# EAGLE board panel - type I - front - pads only (EAGLE 6.1)

Size 82 x 283 mm. Coordinates in mm from the lower left corner, seen from the top.
Outline: 0,0 0,283 82,283 82,0 0,0
Copper layers (1*16): Top 0.035mm / dielectric 1.5mm / Bottom 0.035mm
Design rules: minimum track width 10mil, minimum drill 24mil, track to track 8mil, track to pad 8mil, pad to pad 8mil, via to via 8mil, smd to smd 8mil, copper to edge 40mil, drill to drill 8mil, minimum pad ring 10mil, minimum via ring 8mil, stop-mask expansion 4mil, vias tented up to drill 0mil, thermal gap 10mil
Holes 3.4 mm at 4,3 78,3 6,235 6,97 76,97 76,235
Holes 2.2 mm at 6,279.75 76,279.75

## Footprints (pad centres in the part's own frame; a part is rotated, then mirrored left to right if it is on the bottom)
GENERIC-2PORT = smd 5 x 5: P$1 5,0; P$2 -5,0
SOLARPNL_CIC_PAD = smd 58 x 3: P$3 0,0

## Placement (x,y rotation side)
E$1  [GENERIC-2PORT]  70.1,252.7 0 top
E$2  [GENERIC-2PORT]  70.1,77.9 0 top
E$4  [SOLARPNL_CIC_PAD]  41,3 0 bottom
E$5  [SOLARPNL_CIC_PAD]  41,280 0 bottom

## Library data of the parts
E$1 E$2 E$4 E$5 = space-concordia-power

## Nets
S$1: E$2.P$2
S$2: E$2.P$1
S$3: E$1.P$1
S$4: E$1.P$2
S$5: E$4.P$3
S$6: E$5.P$3